# EAGLE board JDM2_NoDIL (EAGLE 7.7.0)
JDM2 without DIL-Socket
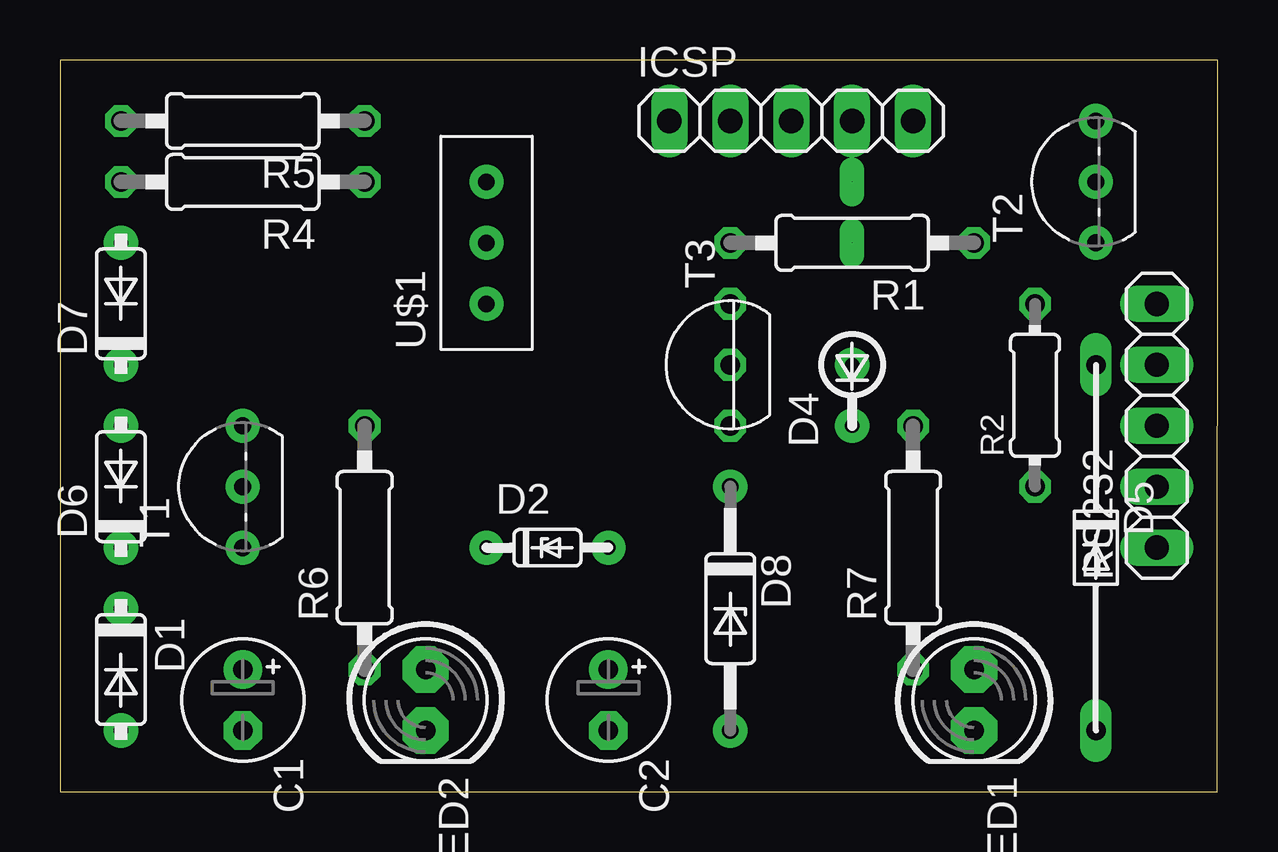
[diagram p0: board, top side]
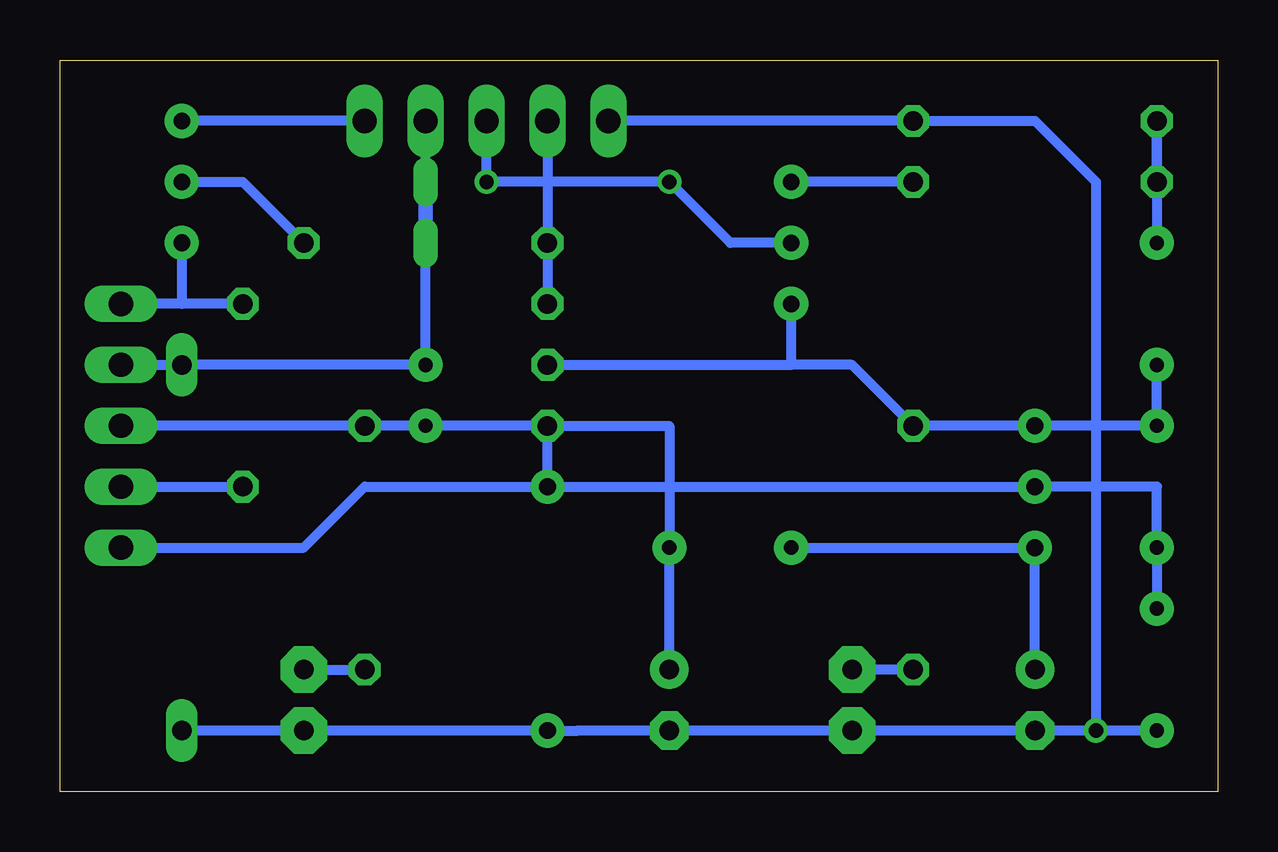
[diagram p1: board, bottom side, seen from below]

Size 48.26 x 30.48 mm. Coordinates in mm from the lower left corner, seen from the top.
Outline: 0,0 48.24,0 48.26,30.48 0,30.48 0,0
Copper layers (1*16): layer 1 0.035mm / dielectric 1.5mm / Bottom 0.035mm
Design rules "default": minimum track width 10mil, minimum drill 24mil, track to track 8mil, track to pad 8mil, pad to pad 8mil, via to via 8mil, smd to smd 8mil, copper to edge 40mil, drill to drill 8mil, minimum pad ring 10mil, minimum via ring 8mil, stop-mask expansion 4mil, vias tented up to drill 0mil, thermal gap 10mil
Net classes: 0 default: width 0.559 mm; 1 power: width 0.559 mm

## Footprints (pad centres in the part's own frame; a part is rotated, then mirrored left to right if it is on the bottom)
E2,5-5 = drill 0.813 pad 1.6: + -1.27,0 | drill 0.813 pad 1.6 octagon: - 1.27,0
DO35-5 = drill 0.6 pad 1.422: A 2.54,0; C -2.54,0
DO35Z5 = drill 0.6 pad 1.422: A 2.54,0; C -2.54,0
DO35-2_54 = drill 0.6 pad 1.422: A 1.27,0; C -1.27,0
DO34-15 = drill 0.813 long: A 7.62,0; C -7.62,0
DO35Z10 = drill 0.7 pad 1.422: A 5.08,0; C -5.08,0
1X05 = drill 1.016 long: 1 -5.08,0; 2 -2.54,0; 3 0,0; 4 2.54,0; 5 5.08,0
DUMMY = drill 0.003 pad 1.016 long: 1 -1.27,0; 2 1.27,0
LED5MM = drill 0.813 pad 1.93 octagon: A -1.27,0; K 1.27,0
0207/10 = drill 0.813 octagon: 1 -5.08,0; 2 5.08,0
0204/7 = drill 0.813 octagon: 1 -3.81,0; 2 3.81,0
TO92-CBE = drill 0.7 pad 1.422: B 0,0; C -2.54,0; E 2.54,0
TO92 = drill 0.813 octagon: 1 -2.54,0; 2 0,0; 3 2.54,0
SPDT = drill 0.686 pad 1.422: 1 -2.54,0; 2 0,0; 3 2.54,0

## Placement (x,y rotation side)
C1  100uF  [E2,5-5]  7.62,3.81 270 top
C2  22uF  [E2,5-5]  22.86,3.81 270 top
D1  1N4148  [DO35-5]  2.54,5.08 270 top
D2  Z=8.1V  [DO35Z5]  20.32,10.16 0 top
D4  1N4148  [DO35-2_54]  33.02,16.51 90 top
D5  1N4148  [DO34-15]  43.18,10.16 270 top
D6  1N4148  [DO35-5]  2.54,12.7 90 top
D7  2N4148  [DO35-5]  2.54,20.32 90 top
D8  Z=5.1V  [DO35Z10]  27.94,7.62 270 top
ICSP  [1X05]  30.48,27.94 0 top
J1  DUMMY  [DUMMY]  33.02,24.13 90 top
LED1  Power  [LED5MM]  38.1,3.81 270 top
LED2  Vpp  [LED5MM]  15.24,3.81 270 top
R1  10k  [0207/10]  33.02,22.86 180 top
R2  1.5k  [0204/7]  40.64,16.51 90 top
R4  1K  [0207/10]  7.62,25.4 180 top
R5  15K  [0207/10]  7.62,27.94 180 top
R6  4.7k  [0207/10]  12.7,10.16 90 top
R7  1k  [0207/10]  35.56,10.16 90 top
RS232  [1X05]  45.72,15.24 90 top
T1  BC547  [TO92-CBE]  7.62,12.7 90 top
T2  BC547  [TO92-CBE]  43.18,25.4 90 top
T3  2N7000  [TO92]  27.94,17.78 90 top
U$1  SPDT  [SPDT]  17.78,22.86 90 top

## Library data of the parts
C1 C2 = rcl
D1 D2 D4-D8 J1 R1 R2 R4-R7 T1-T3 U$1 = JDM2
ICSP RS232 = pinhead
LED1 LED2 = 1dmf

## Nets
2N3904: C1.+ D2.C T1.C
CLK: ICSP.4 J1.2
CTS: R2.2 RS232.5 T2.C
DATA: ICSP.5 T2.E
DTR: R2.1 RS232.2
MCLR: ICSP.3 U$1.2
N$1: R1.1 T2.B
N$2: LED1.A R7.1
N$3: LED2.A R6.1
N$4: R4.1 U$1.3
N$10: D7.A R4.2 R5.2
RTS: D4.A D5.C J1.1 RS232.4
SGND: C2.+ D2.A D4.C D8.C R7.2 RS232.3 T3.1
TXD: D1.C D6.C RS232.1 T1.B
VDD: ICSP.2 R1.2 T3.3
VPP: D6.A D7.C R6.2 T1.E T3.2 U$1.1
VSS: C1.- C2.- D1.A D5.A D8.A ICSP.1 LED1.K LED2.K R5.1

## Tracks (layer width: path | path; a pad name or v marks a point on that pad's centre or on a via)
2N3904
  Bottom 0.406: D2.C T1.C C1.+
CLK
  Bottom 0.406: J1.2 ICSP.4
CTS
  Bottom 0.406: T2.C 43.18,20.32 RS232.5 R2.2
DATA
  Bottom 0.406: ICSP.5 T2.E
DTR
  Bottom 0.406: RS232.2 R2.1
MCLR  (via drill 0.6 layers 16-16)
  Bottom 0.406: U$1.2 20.32,22.86 v22.86,25.4 v30.48,25.4 ICSP.3
N$1
  Bottom 0.406: T2.B 40.64,25.4 R1.1
N$2
  Bottom 0.406: LED1.A R7.1
N$3
  Bottom 0.406: R6.1 LED2.A
N$4
  Bottom 0.406: R4.1 U$1.3
N$10
  Bottom 0.406: R4.2 R5.2 D7.A
RTS
  Bottom 0.406: RS232.4 D5.C D4.A J1.1
SGND
  Bottom 0.406: T3.1 D4.C R7.2 RS232.3 | C2.+ D2.A 22.86,15.24 T3.1 | D8.C T3.1
TXD
  Bottom 0.406: D1.C D6.C 2.54,12.7 T1.B 35.56,12.7 38.1,10.16 RS232.1
VDD
  Bottom 0.406: ICSP.2 R1.2 T3.3
VPP
  Bottom 0.406: 17.78,17.78 15.24,17.78 R6.2 T1.E D6.A D7.C | 17.78,17.78 U$1.1 | T3.2 17.78,17.78
VSS  (via drill 0.6 layers 16-16)
  Bottom 0.406: v5.08,2.54 5.08,25.4 7.62,27.94 R5.1 ICSP.1 | D5.A LED1.K D8.A 26.67,2.54 C2.- LED2.K C1.- v5.08,2.54 | D1.A v5.08,2.54